# Altium PCB eboardPapyFeederV2.1.PcbDoc
Units mm, origin at the board's own origin, x right, y up, seen from the top; angles counter-clockwise.
Board outline 40 x 10 mm, 2 copper layers (Top Layer, Bottom Layer), stack 1.571 mm thick; 18 components, 11 nets, 49 pads, 17 vias.
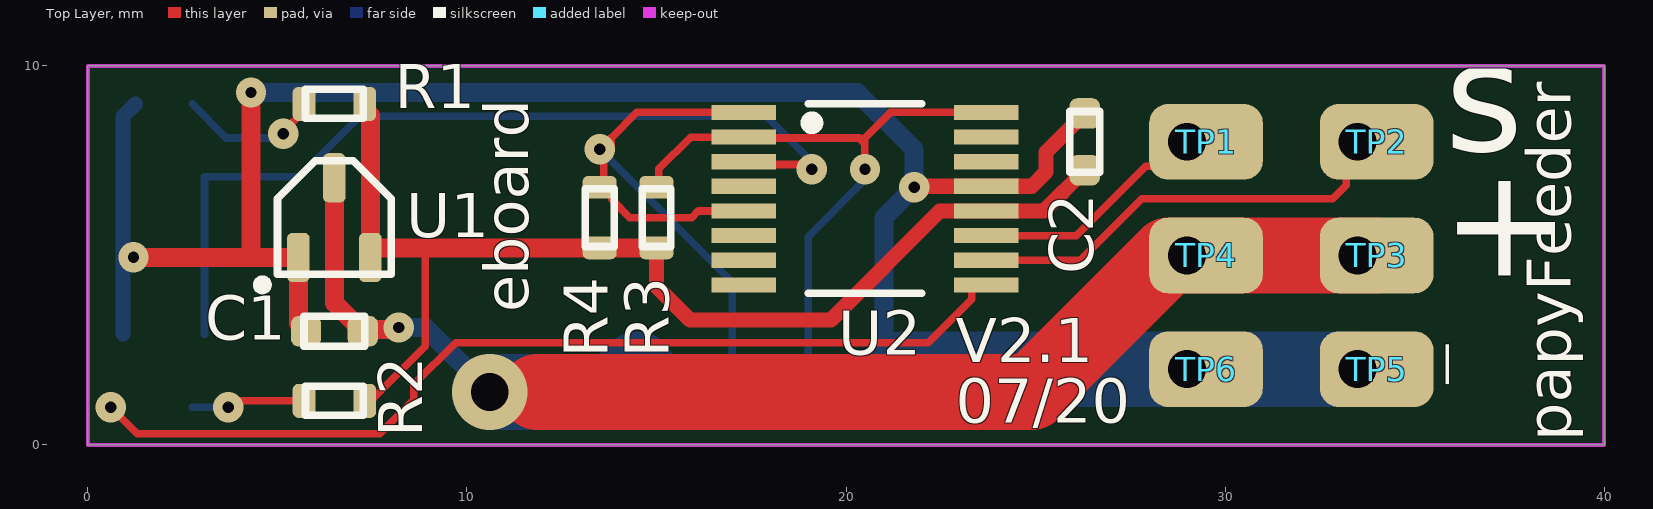
[diagram p0: Top Layer view]
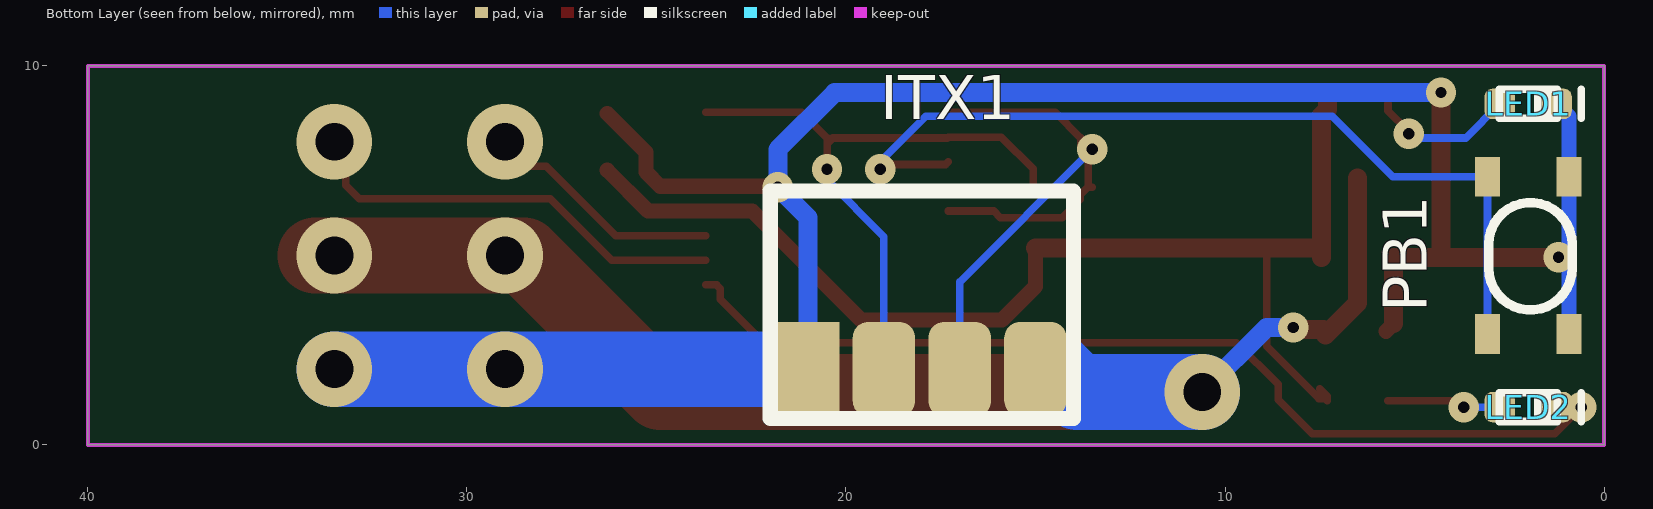
[diagram p1: Bottom Layer view, seen from below]
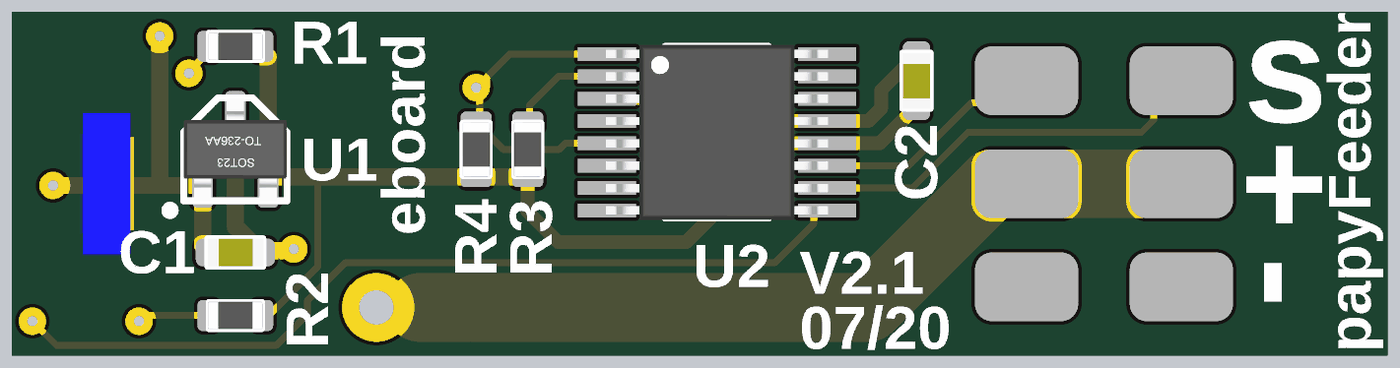
[diagram p2: 3D render of the assembled board from above, using the file's embedded part models]
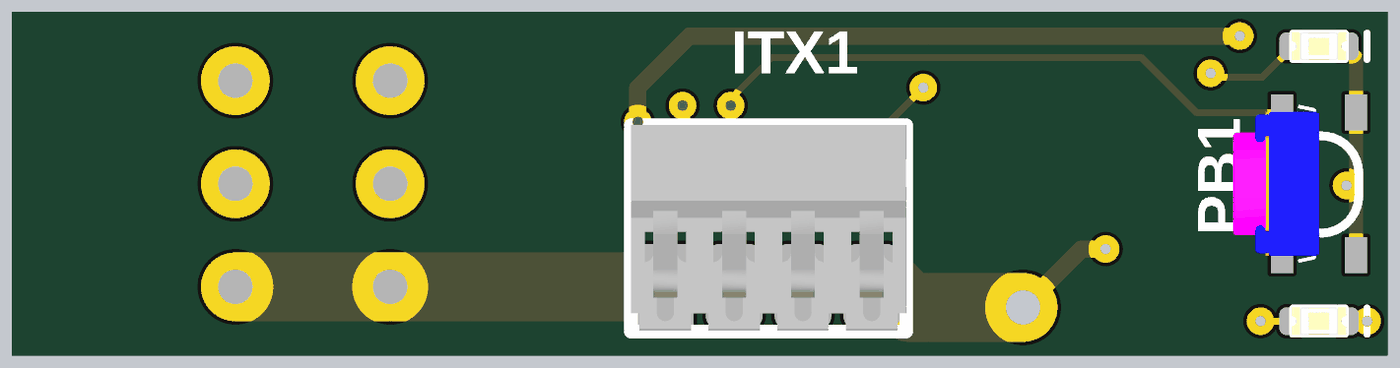
[diagram p3: 3D render of the assembled board from below, using the file's embedded part models]

## Layer stack, top to bottom
Top Solder: solder mask 0.0102, Solder Resist, Dk 3.5
Top Layer: signal copper 0.0356
Dielectric1: dielectric 1.5, FR-4, Dk 4.8
Bottom Layer: signal copper 0.0356
Bottom Solder: solder mask 0.0102, Solder Resist, Dk 3.5

## Board outline
0,0 40,0 40,10 0,10

## Design rules (kind name [scope] priority, off if disabled: settings)
Clearance [All] p1: gap=0.2 ignorepadtopadclearanceinfootprint=FALSE
ComponentClearance [All] p1: gap=0 collisioncheckmode=3 verticalgap=0.254 showdistances=FALSE
FabricationTestPointUsage TestPointUsage [All] p1: valid=0 allowmultiple=FALSE
FabricationTestpoint Testpoint [All] p1: side=3 testpointundercomponent=TRUE minsize=1.016 maxsize=2.54 preferedsize=1.524 minholesize=0 maxholesize=1.016 preferedholesize=0.813 testpointgrid=0.025 allowsidetop=TRUE allowsidebottom=TRUE usegrid=TRUE gridtolerance=0
HoleSize [All] p1: absolutevalues=TRUE maxlimit=5 minlimit=0.3 maxpercent=80.000 minpercent=20.000
PolygonConnect [All] p1: connectstyle=Relief reliefconductorwidth=0.254 reliefentries=4 polygonreliefangle="90 Angle" airgapwidth=0.254
RoutingVias [All] p1: holewidth=0.3 width=0.8 viastyle="Through Hole" minholewidth=0.3 minwidth=0.8 maxholewidth=0.5 maxwidth=2
SilkToSolderMaskClearance SilkscreenOverComponentPads [IsPad] p1: minsilkscreentomaskgap=0.254 clearancetoexposedcopper=TRUE
SolderMaskExpansion [All] p1: expansion=0.102
Width [All] p1: maxlimit=2 minlimit=0.2 preferedwidth=0.5
25 further rules are at their usual default settings.

## Components (designator, comment, footprint, x,y, rotation, side; value= is the part's Value field where it differs from the comment)
C1 "CAP" 0603_CAP 6.5,3 r180 top locked value=10uF
C2 "CAP" 0603_CAP 26.3,8 r90 top locked value=1uF
ITX1 "Header 01X04" HEADER_1X4_2MM_SPRING_01 18,2 r180 bottom locked
LED1 "Green" 0603_LED 2,9 r0 bottom locked
LED2 "RED" 0603_LED 2,1 r0 bottom locked
PB1 "SW_PB" SKRPABE010 2,5 r270 bottom locked
R1 "RES" 0603_RES 6.5,9 r0 top locked value=220
R2 "RES" 0603_RES 6.5,1.166 r0 top locked value=220
R3 "RES" 0603_RES 15,6 r270 top locked value=33k
R4 "RES" 0603_RES 13.5,6 r270 top locked value=33k
TP1 "TP" PAD_TOP_1X5_REC 29.5,8 r90 top locked
TP2 "TP" PAD_TOP_1X5_REC 34,8 r90 top locked
TP3 "TP" PAD_TOP_1X5_REC 34,5 r90 top locked
TP4 "TP" PAD_TOP_1X5_REC 29.5,5 r90 top locked
TP5 "TP" PAD_TOP_1X5_REC 34,2 r90 top locked
TP6 "TP" PAD_TOP_1X5_REC 29.5,2 r90 top locked
U1 "3P-Fixed_GND_VOUT_VIN" SOT95P237X112-3N 6.5,6 r90 top locked
U2 "LPC802M001JDH16J" SOP65P640X110-16M 20.5,6.5 r0 top locked

## Footprints (in the part's own frame and the unit in brackets; to place one, negate y for a bottom-side part, rotate by r counter-clockwise, add the part's x,y. Pads: shape width x height; smd on the part's side, far side on the other; paste and mask are expansions set on the pad)
0603_CAP [mm] "CAPC1608X86M"
  rrect50% 0.8x0.8 smd: 1(-0.75,0) 2(0.75,0)
  silkscreen extent -0.8,-0.4 0.8,0.4, body extent -1.35,-0.67 1.35,0.67, height 0.46
0603_LED [mm]
  rrect50% 0.8x0.8 smd: 1(0.75,0) 2(-0.75,0)
  silkscreen extent -1.4,-0.38 0.76,0.38, body extent -1.35,-0.65 1.35,0.65, height 0.53
0603_RES [mm] "RESC1608X50AM"
  rrect50% 0.6x0.9 smd: 1(-0.8,0) 2(0.8,0)
  silkscreen extent -0.76,-0.38 0.76,0.38, body extent -1.35,-0.65 1.35,0.65, height 0.5
HEADER_1X4_2MM_SPRING_01 [mm]
  rect 1.65x2.5 smd: 1(-3,0)
  rrect50% 1.65x2.5 smd: 2(-1,0) 3(1,0) 4(3,0)
  silkscreen extent -4,-1.3 4,4.7, body extent -4.06,-1.4 4.14,4.74, height 2.5
PAD_TOP_1X5_REC [mm]
  rrect50% 2x3 smd: 1(0,0)
SKRPABE010 [mm]
  rect 1.05x0.65 smd: 1(-2.075,1.075) 1(2.075,1.075) 2(-2.075,-1.075) 2(2.075,-1.075)
  silkscreen extent -1.39,-1.04 1.43,1.16, body extent -2.75,-1.72 2.75,1.71, height 2.5
SOP65P640X110-16M [mm] "TSSOP16"
  rect 1.7x0.4 smd: 1(-3.2,2.275) 2(-3.2,1.625) 3(-3.2,0.975) 4(-3.2,0.325) 5(-3.2,-0.325) 6(-3.2,-0.975) 7(-3.2,-1.625) 8(-3.2,-2.275) 9(3.2,-2.275) 10(3.2,-1.625) 11(3.2,-0.975) 12(3.2,-0.325) 13(3.2,0.325) 14(3.2,0.975) 15(3.2,1.625) 16(3.2,2.275)
  silkscreen extent -1.5,-2.5 1.5,2.5, body extent -4.4,-2.8 4.4,2.8, height 1.25
SOT95P237X112-3N [mm] "SOT23-123, 3-Leads, Body 3.0x2.6mm (max), Pitch 0.95mm, IPC Medium Density"
  rrect50% 1.3x0.6 smd: 1(-1.05,0.95) 2(-1.05,-0.95) 3(1.05,0)
  silkscreen extent -1.9,-1.5 1.5,2.02, body extent -2,-1.78 2,1.78, height 1.3

## Part data
C1: library part GRM188R60J106ME84J, "CAP CER 10UF 6V3 X5R 0603", Manufacturer="Murata Electronics North America", Operating Temperature="-55°C ~ 85°C", Supplier Part Number 1=81-GRM188R60J106ME4J, Temperature Coefficient=X5R, Tolerance="20,00 %", Voltage=6V3, Manufacturer Part Number=GRM188R60J106ME84J, Part Name=GRM188R60J106ME84J, Series=GRM, Supplier 1=Mouser, Technologie=CER
C2: library part CC0603KRX5R8BB105, "CAP CER 1uF 25V X5R 0603", Manufacturer=YAGEO, Operating Temperature="-55°C ~ 85°C", Supplier Part Number 1=603-CC603KRX5R8BB105, Temperature Coefficient=X5R, Tolerance=10.00%, Voltage=25V, Manufacturer Part Number=CC0603KRX5R8BB105, Part Name=CC0603KRX5R8BB105, Part Status=Active, Series=CC, Supplier 1=Mouser, Technologie=CER
ITX1: library part 472861001, "4POS spring connector", Current Rating=1A, Manufacturer=MOLEX, Operating Temperature="-20° to +70°C", Supplier Part Number 1=WM14329CT-ND, Voltage Rated=200V*, Connector Type=NA, Manufacturer Part Number=472861001, Mounting Type=SMD, Number of Positions=4, Number of Rows=1, Part Name=472861001, Pitch=2mm, Series=47286, Supplier 1=Digi-Key
LED1: library part 599-0081-007F, "LED Green 0603", Forward  Current=20mA, Forward  Voltage=3.1V, Manufacturer=Dialight, Operating Temperature="-40°C to 100°C", Supplier Part Number 1=645-599-0081-007F, Color=Green, Manufacturer Part Number=599-0081-007F, Part Name=599-0081-007F, Supplier 1=Mouser, Wavelength=525nm
LED2: library part 599-0010-007F, "LED RED 0603", Forward  Current=20mA, Forward  Voltage=2.1V, Manufacturer=Dialight, Operating Temperature="-40°C to 100°C", Supplier Part Number 1=645-599-0010-007F, Color=RED, Manufacturer Part Number=599-0010-007F, Part Name=599-0010-007F, Supplier 1=Mouser, Wavelength=633nm
PB1: library part SKRPABE010, "Mini momentary push button", Current Rating=50mA, Manufacturer=ALPS, Operating Temperature="-40°C to 90°C", Supplier Part Number 1=688-SKRPAB, Voltage Rated=16VDC, Connector Type=PB, Manufacturer Part Number=SKRPABE010, Mounting Type=SMD, Part Name=SKRPABE010, Supplier 1=Mouser
R1 R2: library part ERJ-3EKF2200V, "RES SMD 220 OHM 1% 1/10W 0603", Manufacturer="Panasonic Electronic Components", Operating Temperature="-55�C ~ 155�C", Power="0.1W, 1/10W", Supplier Part Number 1=P220HCT-ND, Temperature Coefficient=�100ppm/�C, Tolerance=�1%, Composition="Thick Film", Datasheets=http://industrial.panasonic.com/www-cgi/jvcr13pz.cgi?E+PZ+3+AOA0002+ERJ3EKF2200V+7+WW, Manufacturer Part Number=ERJ-3EKF2200V, Part Name=ERJ-3EKF2200V, Part Status=Active, Series=ERJ, Supplier 1=Digi-Key
R3 R4: library part ERJ-3EKF3302V, "RES SMD 33K OHM 1% 1/10W 0603", Manufacturer="Panasonic Electronic Components", Operating Temperature="-55�C ~ 155�C", Power="0.1W, 1/10W", Supplier Part Number 1=P33.0KHCT-ND, Temperature Coefficient=�100ppm/�C, Tolerance=�1%, Composition="Thick Film", Datasheets=http://industrial.panasonic.com/www-cgi/jvcr13pz.cgi?E+PZ+3+AOA0002+ERJ3EKF3302V+7+WW, Manufacturer Part Number=ERJ-3EKF3302V, Part Name=ERJ-3EKF3302V, Part Status=Active, Series=ERJ, Supplier 1=Digi-Key
TP1 TP2 TP3 TP4 TP5 TP6: library part PAD_1x5_REC, "PAD_1x5_REC", Manufacturer=None, Manufacturer Part Number=None, Part Name=PAD_1x5_REC, Supplier 1=None, Supplier Part Number 1=None
U1: library part MCP1799T-3302H/TT, "LDO 3V3 80mA", Dropout Voltage=1.2V, Manufacturer=MICROCHIP, Max Input Voltage=45V, Max Output Current=80mA, Operating Temperature="-40�C to 150�C", Output Voltage=3.3V, Supplier Part Number 1=579-CP1799T-3302H/TT, Voltage Accuracy=±2%, Manufacturer Part Number=MCP1799T-3302H/TT, Part Name=MCP1799T-3302H/TT, Polarity=Positive, Supplier 1=Mouser, Type=LDO
U2: "ARM Cortex M0+", Manufacturer=NXP, Supplier Part Number 1=771-LPC802M001JDH16J, Voltage=3.3V, Manufacturer Part Number=LPC802M001JDH16J, Part Name=LPC802M001JDH16J, Supplier 1=Mouser, Type=Processor

## Via types
v1: diameter 0.8, hole 0.3, Top Layer to Bottom Layer, 10 vias
v2: diameter 2, hole 1, Top Layer to Bottom Layer, 7 vias

## Nets (pads, with @x,y where several pads share a name; then routed paths per layer and width w, separated by ;. In a path a pad name is that pad's centre, name@x,y a point inside that pad or via, vN(x,y) a via of type N, cw(c..) or ccw(c..) an arc to the next point about the centre after c; other vN are vias at no path point)
3V3: C2.1 R1.2 R2.2 R3.2 R4.2 U1.2 U2.12 | length 31.2
  Top Layer w0.2: R2.2 R2.2@7.3,1.227 ; R2.2@7.496,1.485 7.3,1.289 R2.2@7.3,1.227 ; 8.8,5.2 8.9,5.1 8.9,2.6 7.527,1.227 R2.2@7.3,1.227
  Top Layer w0.4: R3.2 15,4.183 15.883,3.3 19.6,3.3 22.475,6.175 U2.12 25.225,6.175 C2.1
  Top Layer w0.5: R1.2 7.3,8.85 7.45,8.7 U1.2@7.45,5.15 ; U1.2 U1.2@7.45,5.15 ; R3.2 R4.2 8.8,5.2 7.5,5.2 U1.2@7.45,5.15
5V: C1.1 ITX1.4 TP3.1 TP4.1 U1.3 | length 38.5
  Top Layer w0.5: U1.3 6.5,3.75 C1.1 7.35,2.9 7.35,3 7.4,3.05 8.15,3.05 v1(8.2,3.1) ; v2(10.6,1.4) 11.857,1.4 12.457,2
  Top Layer w2: 11.857,1.4 24.9,1.4 28.5,5 TP4.1 TP3.1
  Bottom Layer w0.5: v1(8.2,3.1) 8.9,3.1 v2(10.6,1.4)
  Bottom Layer w2: v2(10.6,1.4) 13.9,1.4 ITX1.4@14.5,2
  other v2: 29,5 33.5,5
GND: C1.2 C2.2 ITX1.1 LED1.2 PB1.1 TP5.1 TP6.1 U1.1 U2.13 | length 58.8
  Top Layer w0.4: C1.2@5.55,3.2 C1.2 ; v1(21.8,6.8) 21.825,6.825 U2.13 24.9,6.825 25.275,7.2 25.275,7.725 C2.2
  Top Layer w0.5: v1(1.2,4.95) 4.3,4.95 ; v1(4.3,9.3) 4.3,4.95 ; C1.2@5.55,3.2 U1.1 4.3,4.95
  Bottom Layer w0.4: PB1.1@0.925,2.925 0.925,7.075 0.925,8.675 LED1.2
  Bottom Layer w0.5: v1(4.3,9.3) 20.3,9.3 21.8,7.8 v1(21.8,6.8) 21,6 ITX1.1
  Bottom Layer w2: ITX1.1@21.5,2 v2(29,2) v2(33.5,2)
NetLED1_1: LED1.1 R1.1 | length 3.8
  Top Layer w0.2: v1(5.15,8.215) 5.15,8.273 5.7,8.823 R1.1
  Bottom Layer w0.2: LED1.1 3.65,8.1 4.733,8.1 5.035,8.1 v1(5.15,8.215)
NetLED2_1: LED2.1 R2.1 | length 3
  Top Layer w0.2: v1(3.7,1) 3.866,1.166 R2.1
  Bottom Layer w0.2: LED2.1 v1(3.7,1)
NetLED2_2: LED2.2 U2.9 | length 25.4
  Top Layer w0.2: v1(0.6,1) 1.3,0.3 7.7,0.3 8.6,1.2 8.6,1.6 9.7,2.7 22.175,2.7 23.317,3.842 23.317,4.125 23.417,4.225 U2.9
NetPB1_2: PB1.2 U2.3 | length 23.4
  Top Layer w0.2: U2.3 17.375,7.4 18.813,7.4 18.938,7.275 v1(19.1,7.275)
  Bottom Layer w0.2: PB1.2@3.075,2.925 3.075,7.075 5.575,7.075 7.175,8.675 17.9,8.675 19.1,7.475 v1(19.1,7.275)
PWMFEED: TP1.1 U2.11 | length 6.8
  Top Layer w0.2: U2.11 26.075,5.525 27.909,7.359 28.859,7.359 TP1.1
  other v2: 29,8
PWMSTRIP: TP2.1 U2.10 | length 11.8
  Top Layer w0.2: U2.10 26.175,4.875 27.8,6.5 32.842,6.5 33.2,6.858 33.2,7.2 TP2.1
  other v2: 33.5,8
SCL: ITX1.3 R4.1 U2.1 U2.5 | length 16.6
  Top Layer w0.2: R4.1 R4.1@13.604,6.8 ; v1(13.5,7.8) 13.604,7.696 R4.1@13.604,6.8 ; v1@13.8,7.8 13.8,8.1 14.475,8.775 U2.1 ; U2.5 16.1,6.175 15.925,6 14.3,6 13.819,6.481 13.819,6.604 13.623,6.8 R4.1@13.604,6.8
  Bottom Layer w0.2: v1(13.5,7.8) 17,4.3 ITX1.3
SDA: ITX1.2 R3.1 U2.2 U2.16 | length 17.2
  Top Layer w0.2: R3.1 15.058,6.858 15.058,7.283 15.9,8.125 U2.2 17.325,8.1 20.35,8.1 20.5,7.95 v1(20.5,7.275) 20.5,8.1 21.175,8.775 U2.16
  Bottom Layer w0.2: ITX1.2 19,5.5 20.5,7 v1(20.5,7.275)
pads on no net: U2.4 U2.6 U2.7 U2.8 U2.14 U2.15

## Keep-outs
Keep-Out Layer:
  the board outline again, w0.1

## Silkscreen, mask and mechanical layers (free items; w line width, h text height)
Top Overlay:
  text "s" at 35.8,6.8 h5
  text "eboard" at 12,3.5 h2 r90
  text "+" at 35.7,3.5 h5
  text "V2.1" at 22.9,1.8 h2
  text "-" at 37.8,1.4 h5 r90
  text "07/20" at 22.9,0.2 h2
  text "papyFeeder" at 39.5,0.1 h2 r90
Mechanical 1:
  the board outline again, w0.1
Mechanical 4:
  lines w0.2: 9,-2 9,16 ; 11.992,-2.003 11.992,15.997 ; 37,-2 37,16 ; 39.992,-2.003 39.992,15.997

## Dimensions
0,13 to 9,16 on Mechanical 4
0,0 to 0,10 on Mechanical 4
0,10 to 40,10 on Mechanical 4